# Altium PCB Siren.PcbDoc
Units mil, origin at the board's own origin, x right, y up, seen from the top; angles counter-clockwise.
Board outline 2080 x 1930 mil, 2 copper layers (Top Layer, Bottom Layer); 32 components, 18 nets, 137 pads, 30 vias.
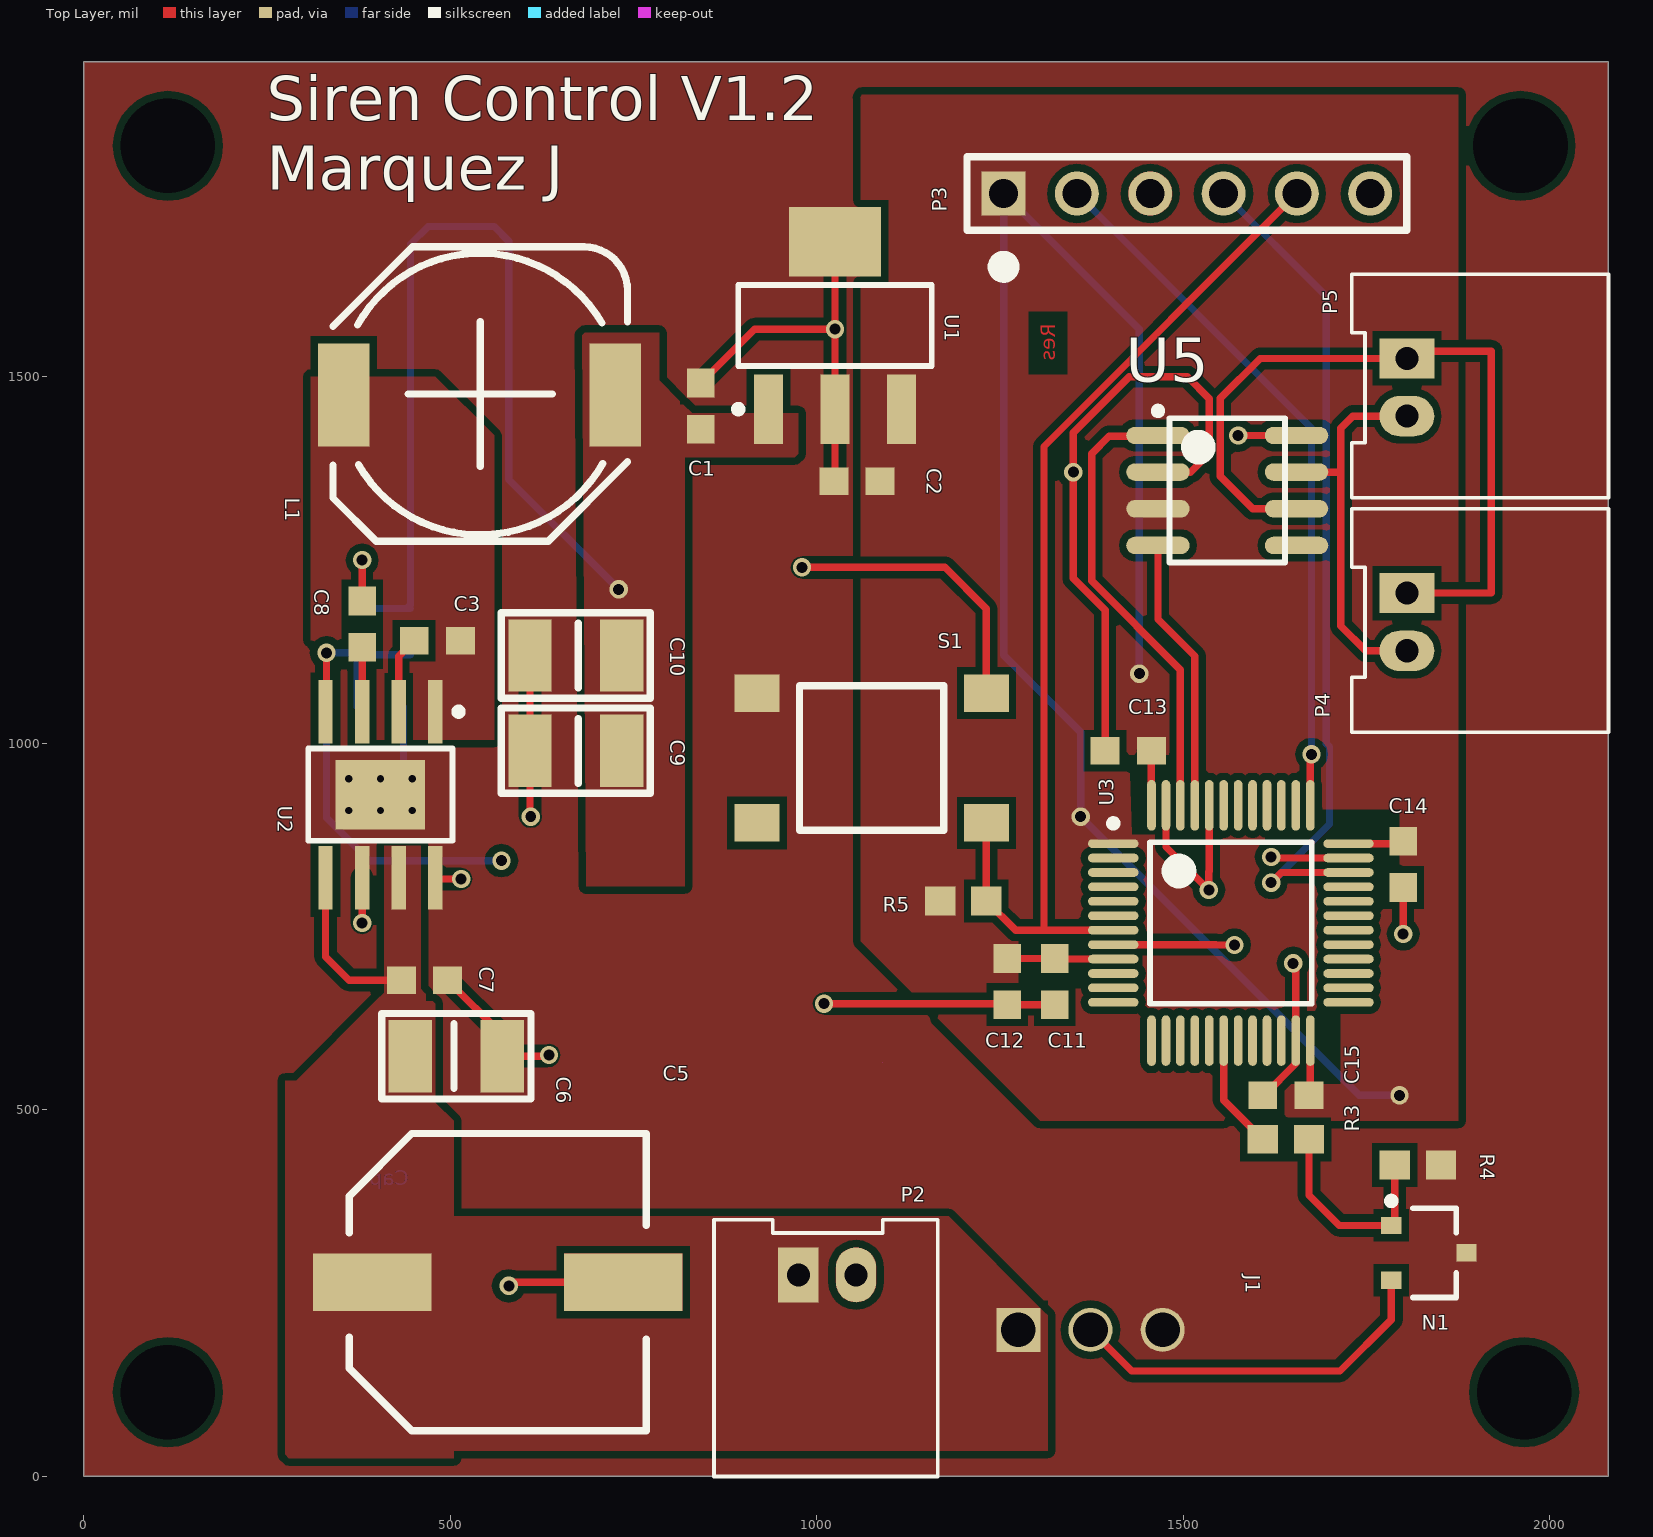
[diagram p0: Top Layer view]
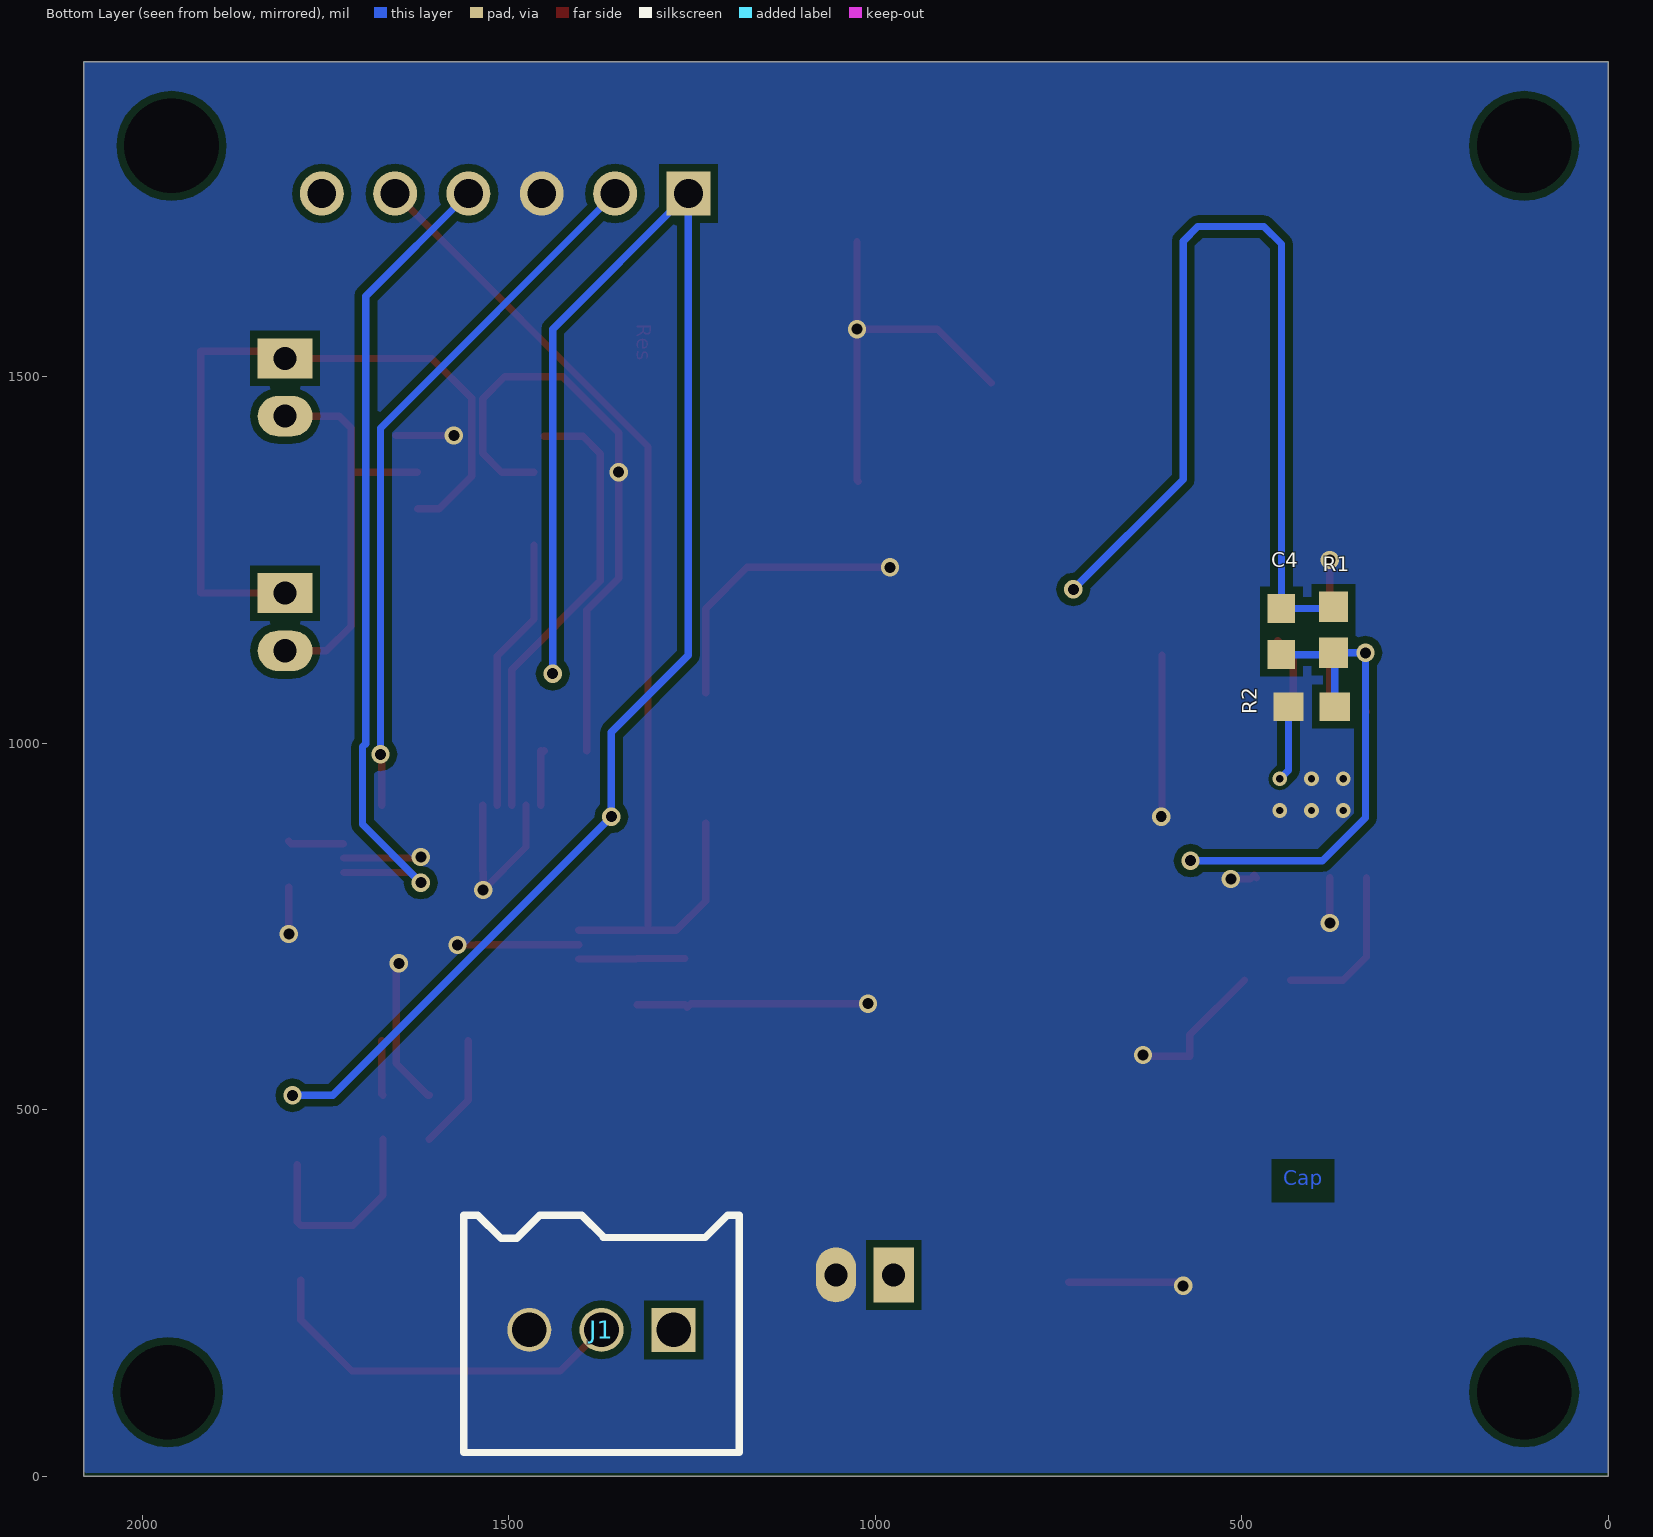
[diagram p1: Bottom Layer view, seen from below]

## Layer stack, top to bottom
Top Solder: solder mask 0.4, Solder Resist, Dk 3.5
Top Layer: signal copper 1.4
Dielectric 1: dielectric 12.6, FR-4, Dk 4.8
Bottom Layer: signal copper 1.4
Bottom Solder: solder mask 0.4, Solder Resist, Dk 3.5

## Board outline
2080,1930 0,1930 0,0 2080,0

## Design rules (kind name [scope] priority, off if disabled: settings)
Clearance [All] p1: gap=10 ignorepadtopadclearanceinfootprint=FALSE except(0: Arc-Hole Track-Hole SMDPad-Hole THPad-Hole Via-Hole Fill-Hole Poly-Hole Region-Hole Text-Hole; 5: Track-Track Track-SMDPad SMDPad-SMDPad; 7: Track-Via)
HoleSize [All] p1: absolutevalues=TRUE maxlimit=150 minlimit=10 maxpercent=80.000 minpercent=20.000
MinimumAnnularRing [All] p1: minimumring=5
MinimumSolderMaskSliver [All] p1: minsoldermaskwidth=1
PolygonConnect [All] p1: connectstyle=Direct reliefconductorwidth=10 reliefentries=4 polygonreliefangle="90 Angle" airgapwidth=10
RoutingVias [All] p1: holewidth=10 width=22 viastyle="Through Hole" minholewidth=10 minwidth=22 maxholewidth=100 maxwidth=150
SilkToSolderMaskClearance [IsPad] p1: minsilkscreentomaskgap=5 clearancetoexposedcopper=TRUE
SolderMaskExpansion [All] p1: expansion=4
Width [All] p1: maxlimit=150 minlimit=8 preferedwidth=10
27 further rules are at their usual default settings.

## Classes and differential pairs
component class CAN_Connections: P4 P5 U5
component class PCB_Siren: C11 C12 C13 C14 C15 J1 N1 P3 R3 R4 R5 S1 U3
component class 24Vto5Vat1A-R1: C3 C5 C6 C7 C8 C9 C10 L1 P2 R1 R2 U2
component class 5Vto3V3_Power_Connector: C1 C2 U1

## Components (designator, comment, footprint, x,y, rotation, side; value= is the part's Value field where it differs from the comment)
C1 "Cap" CAPC0603 841.76,1460 r90 top value=1uF
C2 "Cap" CAPC0603 1055,1357.23 r180 top value=1uF
C3 "Cap" CAPC0603 482.53,1140 r0 top value=470nF
C4 "Cap" CAPC0603 446.03,1152.53 r270 bottom
C5 "EEHZA1H101P" EEHZA1H101P 565,265 r90 top value=100uF
C6 "Cap" CAP1210 445,573.28 r180 top value=10uF
C7 "Cap" CAPC0603 465,677.07 r0 top value=100nF
C8 "Cap" CAPC0603 380,1162.51 r90 top value=10uF
C9 "Cap" CAP1210 735,990 r0 top value=47uF
C10 "Cap" CAP1210 735,1120 r0 top value=47uF
C11 "Cap" CAPC0603 1325,675 r270 top value=1uF
C12 "Cap" CAPC0603 1260,675 r270 top value=10nF
C13 "Cap" CAPC0603 1425,990 r180 top value=100nF
C14 "Cap" CAPC0603 1800,835 r270 top value=100nF
C15 "Cap" CAPC0603 1640,520 r180 top value=100nF
J1 "MCV_0,5/3-G-2,5" MCV_0,5/3-G-2,5 1275,200 r0 bottom
L1 "MSS1048-563MLB" MSS1048-563MLB 540,1475 r90 top value=56uH
N1 "SSM3K329R,LF" SSM3K329R,LF 1835,305 r0 top
P2 "2-pin Horz Sherlock" MOLEX-HDR-1X2-SHERLOCK-HORZ 975,275 r180 top
P3 "SWD" SWD_STM32 1255,1750 r90 top
P4 "2-pin Horz Sherlock" MOLEX-HDR-1X2-SHERLOCK-HORZ 1805,1205 r90 top
P5 "2-pin Horz Sherlock" MOLEX-HDR-1X2-SHERLOCK-HORZ 1805,1525.01 r90 top
R1 "Res" RES0603 375,1155 r270 bottom value=40.2k
R2 "Res" RES0603 405,1050 r0 bottom value=10k
R3 "Res" RES0603 1640,460 r0 top value=100
R4 "Res" RES0603 1820,425 r0 top value=10k
R5 "Res" RES0603 1200,785 r0 top value=1k
S1 "Button" PTS645xxxxSMTR92 1075,980 r180 top
U1 "3.3V LDO Reg" SOT23-4n 1025,1570 r90 top
U2 "LMR23610ADDAR" LMR23610ADDAR 405,930 r270 top
U3 "STM32F072CB" STM32F072CB 1565,755 r0 top
U5 "SN65HVD230DR" SOIC-8pin 1560,1345 r0 top

## Footprints (in the part's own frame and the unit in brackets; to place one, negate y for a bottom-side part, rotate by r counter-clockwise, add the part's x,y. Pads: shape width x height; smd on the part's side, far side on the other; paste and mask are expansions set on the pad)
CAP1210 [mm]
  rect 1.5x2.5 smd: 1(-0.02,0) 2(-3.2,0)
  silkscreen extent -4.2,-1.48 0.97,1.48, body extent -3.22,-1.25 0,1.26, height 2.5
CAPC0603 [mm] "Chip Capacitor, 2-Leads, Body 1.60x0.80mm, IPC Medium Density"
  rect 1x0.95 smd: 1(-0.8,0) 2(0.8,0)
  body extent -0.88,-0.48 0.87,0.48, height 0.8
EEHZA1H101P [mm] "CAP ALUM POLY HYB 100UF 50V SMD"
  rect 2x4.1 smd: 1(0,4.35) 2(0,-4.35)
  silkscreen extent -5.15,-5.15 5.15,5.15, body extent -5.24,-5.99 5.25,5.99, height 10.54
LMR23610ADDAR [mm] "IC REG BUCK ADJ 1A SYNC 8SOPWRPD"
  rect 2.2x0.5 smd: 1(-2.875,1.905) 2(-2.875,0.635) 3(-2.875,-0.635) 4(-2.875,-1.905) 5(2.875,-1.905) 6(2.875,-0.635) 7(2.875,0.635) 8(2.875,1.905)
  rect 2.4x3.1 smd: 9(0,0)
  silkscreen extent -3,-2.5 1.6,2.83, body extent -2,-2.5 2,2.5, height 1.7
MCV_0,5/3-G-2,5 [mil] "CONN TERM BLOCK 2.50MM 3POS"
  rect 60x60 hole 47.24: 1(0,0)
  round 60 hole 47.24: 2(98.43,0) 3(196.85,0)
  silkscreen extent -90,-156 286,167, body extent -87,-154 283,165, height 138
MOLEX-HDR-1X2-SHERLOCK-HORZ [mm]
  rect 1.397x1.905 hole 0.8: 1(0,0)
  oval 1.397x1.905 hole 0.8: 2(-2,0)
  silkscreen extent -4.83,-1.91 2.92,6.98, body extent -4.83,-1.91 2.87,8.59, height 5.54
MSS1048-563MLB [mm] "FIXED IND 56UH 1.7A 126 MOHM"
  rect 3.56x1.78 smd: 1(0,4.7) 2(0,-4.7)
  silkscreen extent -5.06,-5.13 5.14,5.07, body extent -5.1,-5.15 5.1,5.15, height 5
PTS645xxxxSMTR92 [mm] "PTS645 Series SMT 6 mm Tactile Switch"
  rect 1.555x1.3 smd: A(-3.975,-2.25) A(3.975,-2.25) B(-3.975,2.25) B(3.975,2.25)
  silkscreen extent -2.5,-2.5 2.5,2.5, body extent -3,-3 3,3, height 4.5
RES0603 [mm] "Chip Resistor, 2-Leads, Body 1.60x0.80mm, IPC Medium Density"
  rect 1.05x1 smd: 1(-0.8,0) 2(0.8,0)
  body extent -0.88,-0.48 0.87,0.47, height 0.8
SOIC-8pin [mm] "For 296-1345-1-ND"
  oval 2.2x0.6 smd: 1(-2.4,1.905) 2(-2.4,0.635) 3(-2.4,-0.635) 4(-2.4,-1.905) 5(2.4,-1.905) 6(2.4,-0.635) 7(2.4,0.635) 8(2.4,1.905)
  silkscreen extent -2.52,-2.5 2,2.88, body extent -2,-2.5 2,2.5, height 1.75
SOT23-4n [mm] "SOT223, 4-Leads, Body 6.50x7.00mm (avg), Pitch 2.30mm, IPC Medium Density"
  rect 2.4x1 smd: 1(-2.9,2.3) 2(-2.9,0) 3(-2.9,-2.3)
  rect 2.4x3.2 smd: 4(2.9,0)
  silkscreen extent -3.02,-3.35 1.4,3.47, body extent -1.85,-3.35 1.85,3.35, height 1.7
SSM3K329R,LF [mm] "MOSFET N CH 30V 3.5A 2-3Z1A"
  rect 0.7x0.6 smd: 1(-1.3,0.95) 2(-1.3,-0.95) 3(1.3,0)
  silkscreen extent -1.42,-1.55 0.95,1.92, body extent -0.95,-1.55 0.95,1.55, height 0.8
STM32F072CB [mm] "TSQFP, 48-Leads, Body 7.00x7.00mm, Pitch 0.50mm, IPC Medium Density"
  oval 1.75x0.3 smd: 1(-4.075,2.75) 2(-4.075,2.25) 3(-4.075,1.75) 4(-4.075,1.25) 5(-4.075,0.75) 6(-4.075,0.25) 7(-4.075,-0.25) 8(-4.075,-0.75) 9(-4.075,-1.25) 10(-4.075,-1.75) 11(-4.075,-2.25) 12(-4.075,-2.75) 25(4.075,-2.75) 26(4.075,-2.25) 27(4.075,-1.75) 28(4.075,-1.25) 29(4.075,-0.75) 30(4.075,-0.25) 31(4.075,0.25) 32(4.075,0.75) 33(4.075,1.25) 34(4.075,1.75) 35(4.075,2.25) 36(4.075,2.75)
  oval 0.3x1.75 smd: 13(-2.75,-4.075) 14(-2.25,-4.075) 15(-1.75,-4.075) 16(-1.25,-4.075) 17(-0.75,-4.075) 18(-0.25,-4.075) 19(0.25,-4.075) 20(0.75,-4.075) 21(1.25,-4.075) 22(1.75,-4.075) 23(2.25,-4.075) 24(2.75,-4.075) 37(2.75,4.075) 38(2.25,4.075) 39(1.75,4.075) 40(1.25,4.075) 41(0.75,4.075) 42(0.25,4.075) 43(-0.25,4.075) 44(-0.75,4.075) 45(-1.25,4.075) 46(-1.75,4.075) 47(-2.25,4.075) 48(-2.75,4.075)
  silkscreen extent -4.2,-2.8 2.8,3.57, body extent -3.5,-3.5 3.5,3.5, height 1.6
SWD_STM32 [mil] "SWD connector matching the pinout on STM Discovery Boards"
  rect 60x60 hole 39.37: 1(0,0)
  round 60 hole 39.37: 2(0,-100) 3(0,-200) 4(0,-300) 5(0,-400) 6(0,-500)
  silkscreen extent -110,-550 50,50

## Part data
C1 C2 C3 C6 C7 C8 C13 C14 C15: Supplier Part Number 1=1276-1000-1-ND, Supplier 1=Digi-Key
C5: "CAP ALUM POLY HYB 100UF 50V SMD", Manufacturer 1=Panasonic, Supplier Part Number 1=P15442CT-ND, Tolerance=20%, Voltage=50V, ComponentLink1Description="Web Site", ComponentLink1URL=https://na.industrial.panasonic.com/products/capacitors/aluminum-electrolytic-capacitors/conductive-polymer-hybrid-aluminum-electrolytic/series/za-high-temp-reflow/ABA0135/model/EEHZA1H101P, ComponentLink2Description="Data Sheet", ComponentLink2URL=https://industrial.panasonic.com/cdbs/www-data/pdf/RDD0000/ABA0000C1221.pdf, ComponentLink3Description="ZA Series Technical Data", ComponentLink3URL=https://industrial.panasonic.com/cdbs/www-data/pdf/RDD0000/ABA0000COS44.pdf, Manufacturer Part Number 1=EEHZA1H101P, Supplier 1=Digi-Key
C9 C10: Supplier Part Number 1=490-6538-1-ND, Supplier 1=Digi-Key
J1: "CONN TERM BLOCK 2.50MM 3POS, Vertical, Through-Hole, 4A", Manufacturer 1="Phoenix Contact", Manufacturer Part Number 1=1881561, Supplier Part Number 1=277-1453-ND, Mating Connector=277-1431-ND, Supplier 1=Digi-Key
L1: "FIXED IND 56UH 1.7A 126 MOHM", Manufacturer 1=Coilcraft, ComponentLink1Description="Web Site", ComponentLink1URL=https://www.coilcraft.com/mss1048.cfm, Manufacturer Part Number 1=MSS1048-563MLB, Supplier 1=Coilcraft, Supplier Part Number 1=MSS1048-563MLB
N1: "MOSFET N CH 30V 3.5A 2-3Z1A", Manufacturer 1="Toshiba Semiconductor and Storage", Supplier Part Number 1=SSM3K329RLFTR-ND, Manufacturer Part Number 1=SSM3K329R,LF, Supplier 1=Digi-Key
P2 P4 P5: library part MOLEX-HDR-1x2-SHERLOCK_RA, "Header, Molex, 2mm Pitch Sherlock Header, Single Row, Horizontal, 2 Circuits, Length 3.3mm,  0353630260", Manufacturer="Molex Inc", Manufacturer Part Number=0353630260, Supplier Part Number 1=WM18931-ND, Supplier 1=Digi-Key
P3: library part SWD_STM32, "SWD connector matching the pinout on STM Discovery Boards"
R1: Supplier Part Number 1=RMCF0603FT40K2CT-ND, Supplier 1=Digi-Key
R2 R4: Supplier Part Number 1=RMCF0603JT10K0CT-ND, Supplier 1=Digi-Key
R3: Supplier Part Number 1=311-100LRDKR-ND, Supplier 1=Digi-Key
S1: "SPST Button", Supplier Part Number 1=CKN9087CT-ND, Supplier 1=Digi-Key
U1: library part LM3940IMPX-3.3, "IC REG LDO 3.3V 1A SOT223", Supplier Part Number 1=LM3940IMPX-3.3/NOPBCT-ND, Supplier 1=Digi-Key
U2: "IC REG BUCK ADJ 1A SYNC 8SOPWRPD", Manufacturer 1="Texas Instruments", Supplier Part Number 1=296-47267-1-ND, ComponentLink1Description=Datasheet, ComponentLink1URL=http://www.ti.com/lit/ds/symlink/lmr23610.pdf, ComponentLink2Description="Web Site", ComponentLink2URL=http://www.ti.com/product/LMR23610/description, Manufacturer Part Number 1=LMR23610ADDAR, Supplier 1=Digi-Key
U3: "MCU 32BIT 128KB FLASH 48LQFP", Supplier Part Number 1=497-14645-ND, Supplier 1=Digi-Key
U5: "IC TXRX CAN 1MBPS 3.3V 8SOIC", Supplier Part Numbe 1=296-11654-1-ND, Supplier 1=Digi-Key
C11 C12 R5: Supplier 1=Digi-Key

## Free pads (board coordinates)
  round 60 hole 129: 1(1965,115) 4(1960,1815) 5(115,1815) 9(115,115)

## Via types
v1: diameter 25, hole 15, Top Layer to Bottom Layer, tented both sides, 24 vias
v2: diameter 20, hole 10, Top Layer to Bottom Layer, tented both sides, 6 vias

## Nets (pads, with @x,y where several pads share a name; then routed paths per layer and width w, separated by ;. In a path a pad name is that pad's centre, name@x,y a point inside that pad or via, vN(x,y) a via of type N, cw(c..) or ccw(c..) an arc to the next point about the centre after c; other vN are vias at no path point)
3V3: C2.1 C11.1 C12.1 C13.1 C14.1 C15.1 P3.1 R5.1 U1.3 U3.1 U3.9 U3.24 U3.36 U3.48 U5.3 | length 2595.7
  Top Layer w10: C12.1 C11.1 1325.71,705.79 U3.9 ; C13.1@1451.5,990 C13.1@1456.5,985 ; C13.1 C13.1@1456.5,985 ; U3.48 1456.5,915.67 C13.1@1456.5,985 ; C13.1@1456.73,984.76 C13.1@1456.5,985 ; C15.1 1673.27,521.77 U3.24 ; U3.36 1796.77,863.27 C14.1
  Bottom Layer w10: v1(1440,1095) 1440,1565 P3.1 1255,1120 1360,1015 v1(1360,900) 1740,520 v1(1795,520)
5V: C1.1 C4.1 C9.1 C10.1 L1.2 R1.1 U1.1 | length 1256.9
  Bottom Layer w10: R1.1 377.47,1184.03 C4.1 C4.1@443.56,1186.5 ; C4.1@446.03,1188.97 446.03,1681.03 470,1705 560,1705 580,1685 580,1360 v1(730,1210)
24V: C5.1 C6.1 C7.1 J1.1 P2.1 U2.5 U2.7 | length 249.5
  Top Layer w10: U2.5 330,709.13 362.07,677.07 C7.1 ; P2.1 P2.1@975,300
CANRX: U3.45 U5.4 | length 375.4
  Top Layer w10: U5.4 1465.51,1169.49 1515.79,1119.21 U3.45
CANTX: U3.46 U5.1 | length 616.4
  Top Layer w10: U5.1@1451.84,1418.67 1398.67,1418.67 1375,1395 1375,1221.63 1496.1,1100.53 U3.46
GND: C1.2 C2.2 C5.2 C6.2 C7.2 C8.2 C9.2 C10.2 C11.2 C12.2 C13.2 C14.2 C15.2 J1.3 N1.3 P2.2 P3.3 R2.2 R4.2 S1.A U1.2 U1.4 U2.6 U2.8 U2.9 U3.8 U3.23 U3.35 U3.44 U3.47 U5.2 U5.8 | length 3794.8
  Top Layer w10: v1(380,755) U2.6 ; C8.2 v1(380,1250) ; U2.8 483.19,820 488.19,815 v1(515,815) ; C7.2 570.98,602.58 C6.2 633.28,573.28 v1(635,575) ; v1(580,260) 585,265 C5.2 ; C10.2 C9.2 609.02,900.98 v1(610,900) ; C1.2 915.27,1565 v1(1025,1565) ; v1(980,1240) 1175,1240 1231.5,1183.5 S1.A@1231.5,1068.58 ; v1(1010,645) 1251.5,645 1256.5,640 C12.2 C11.2 ; C2.2 1025,1358.73 U1.2 v1(1025,1565) ; U1.4 v1(1025,1565) ; C13.2 1393.5,1181.5 1350,1225 v1(1350,1370) 1350,1423.79 1426.21,1500 1505.71,1500 1535.5,1470.21 1535.5,1395.5 1510,1370 U5.2 ; U3.8 1544.53,725.47 1545,725 v1(1570,725) ; U3.47 1476.42,858.58 v1(1535,800) 1535,825 1535.47,825.47 U3.44 ; v1(1575,1420) U5.8 ; C15.2 1610.37,520 1653.58,563.22 U3.23 1653.58,696.42 v1(1650,700) ; v1(1620,845) 1621.42,843.58 U3.35 ; v1(1800,740) C14.2
  Bottom Layer w10: R2.2 436.5,963.46 v2(448.31,951.65)
  other v2: 361.69,908.35 405,908.35 448.31,908.35 361.69,951.65 405,951.65
NetC3_1: C3.1 U2.2 | length 105.5
  Top Layer w10: U2.2 430,1118.97 C3.1
NetC3_2: C3.2 L1.1 U2.1
NetC4_2: C4.2 R1.2 R2.1 U2.4 | length 760.6
  Top Layer w10: U2.4 331.5,1044.68 v1(331.5,1123.5)
  Bottom Layer w10: R2.1 373.5,1122.01 374.48,1121.03 C4.2 C4.2@443.56,1123.5 ; R1.2 v1(331.5,1123.5) 331.5,898.5 390,840 v1(570,840)
NetC8_1: C8.1 U2.3 | length 87.8
  Top Layer w10: U2.3 C8.1
NetJ1_2: J1.2 N1.2 | length 516.4
  Top Layer w10: J1.2 1429.61,143.82 1713.82,143.82 1783.82,213.82 N1.2
NetN1_1: N1.1 R3.2 R4.1 | length 290.4
  Top Layer w10: R3.2 1671.5,383.5 1712.6,342.4 N1.1 1788.5,347.09 R4.1
NetP4_1: P4.1 P5.1 U5.6 | length 1039.6
  Top Layer w10: U5.6@1624.49,1320 1595,1320 1550.5,1364.5 1550.5,1470.5 1605.01,1525.01 P5.1 1814.99,1535 1920,1535 1920,1205 P4.1
NetP4_2: P4.2 P5.2 U5.7 | length 561.2
  Top Layer w10: U5.7@1624.49,1370 1715,1370 ; P4.2 1748.74,1126.26 1715,1160 1715,1370 ; P5.2 1731.27,1446.27 1715,1430 1715,1385 1715,1370
NetR3_1: R3.1 U3.18 | length 156.7
  Top Layer w10: U3.18 1555.16,513.35 R3.1
NRST: P3.5 R5.2 S1.B U3.7 | length 1443.7
  Top Layer w10: S1.B@1231.5,891.42 R5.2 1271.34,745.16 1310,745.16 ; U3.7 1310,745.16 ; P3.5 1310,1405 1310,745.16
SWCLK: P3.2 U3.37 | length 967.8
  Top Layer w10: U3.37 1673.27,983.27 v1(1675,985)
  Bottom Layer w10: P3.2 1675,1430 v1(1675,985)
SWDIO: P3.4 U3.34 | length 1144
  Top Layer w10: v1(1620,810) 1633.9,823.9 U3.34
  Bottom Layer w10: P3.4 1695,1610 1695,999.65 1699.5,995.15 1699.5,889.5 v1(1620,810)
pads on no net: P3.6 U3.2 U3.3 U3.4 U3.5 U3.6 U3.10 U3.11 U3.12 U3.13 U3.14 U3.15 U3.16 U3.17 U3.19 U3.20 U3.21 U3.22 U3.25 U3.26 U3.27 U3.28 U3.29 U3.30 U3.31 U3.32 U3.33 U3.38 U3.39 U3.40 U3.41 U3.42 U3.43 U5.5

## Polygon pours and split planes (outlines as drawn)
GND on Top Layer "3V3" (solid, pour order 70): 0,1930 2080,1930 2080,0 0,0
3V3 on Top Layer "3V3" (solid, pour order 68): 1055,1885 1060,1880 1060,730 1305,485 1875,485 1875,1885
5V on Top Layer "Vout-5V" (solid, pour order 20): 680,1560 785,1560 785,1495 815,1465 830,1450 975,1450 975,1395 970,1390 820,1390 820,805 685.72,805
no net on Top Layer "3V3" (solid, pour order 50): 1025,1830
24V on Top Layer "Vin-24V" (solid, pour order 24): 470,355 1140,355 1180,355 1310,225 1315,220 1315,35 480,35
NetC3_2 on Top Layer "NetC3_2" (solid, pour order 26): 310,1500 310,1005 560,1005 560,1315 560,1420 480,1500
GND on Top Layer "GND" (solid, pour order 46): 1165,1300
24V on Top Layer "Vin-24V" (solid, pour order 0): 410,860 410,815 410,775 410,660 400,650 290,540 275,540 275,30 280,25 505,25 505,485 480,510 480,645 465,660 460,665 460,860
GND on Bottom Layer "3V3" (solid, pour order 72): 0,1930 2080,1930 2080,0 2075,5 0,5
GND on Bottom Layer "GND" (solid, pour order 40): 255,-40
GND on Bottom Layer "GND" (solid, pour order 34): 670,-1095
GND on Bottom Layer "GND" (solid, pour order 30): 125,1830

## Keep-outs
Top Layer:
  region: 1090,565

## Other copper
Top Layer:
  pour cut-out: 1640,635 1715,635 1715,535 1640,535
  pour cut-out: 1690,910 1795,910 1795,835 1690,835
  pour cut-out: 1426.57,984.76 1480,984.76 1480,875 1430,875
  pour cut-out: 1430,1025
  pour cut-out: 1275,745 1445,745 1445,680 1430,665 1275,665

## Silkscreen, mask and mechanical layers (free items; w line width, h text height)
Top Overlay:
  text "Siren Control V1.2" at 250,1850 h60
  text "Marquez J" at 250,1755 h60
Board Outline:
  the board outline again, w10
Drill Drawing:
  lines w10: 2080,0 0,0 0,1930 2080,1930